# Altium PCB DoorCardController.PcbDoc (part 2 of 2)
Units mm, origin at the board's own origin, x right, y up, seen from the top; angles counter-clockwise.
Board outline 87 x 117.3 mm, 2 copper layers (Top Layer, Bottom Layer); 141 components, 112 nets, 420 pads, 246 vias.
Unrouted connection lines stored in the file: 29.
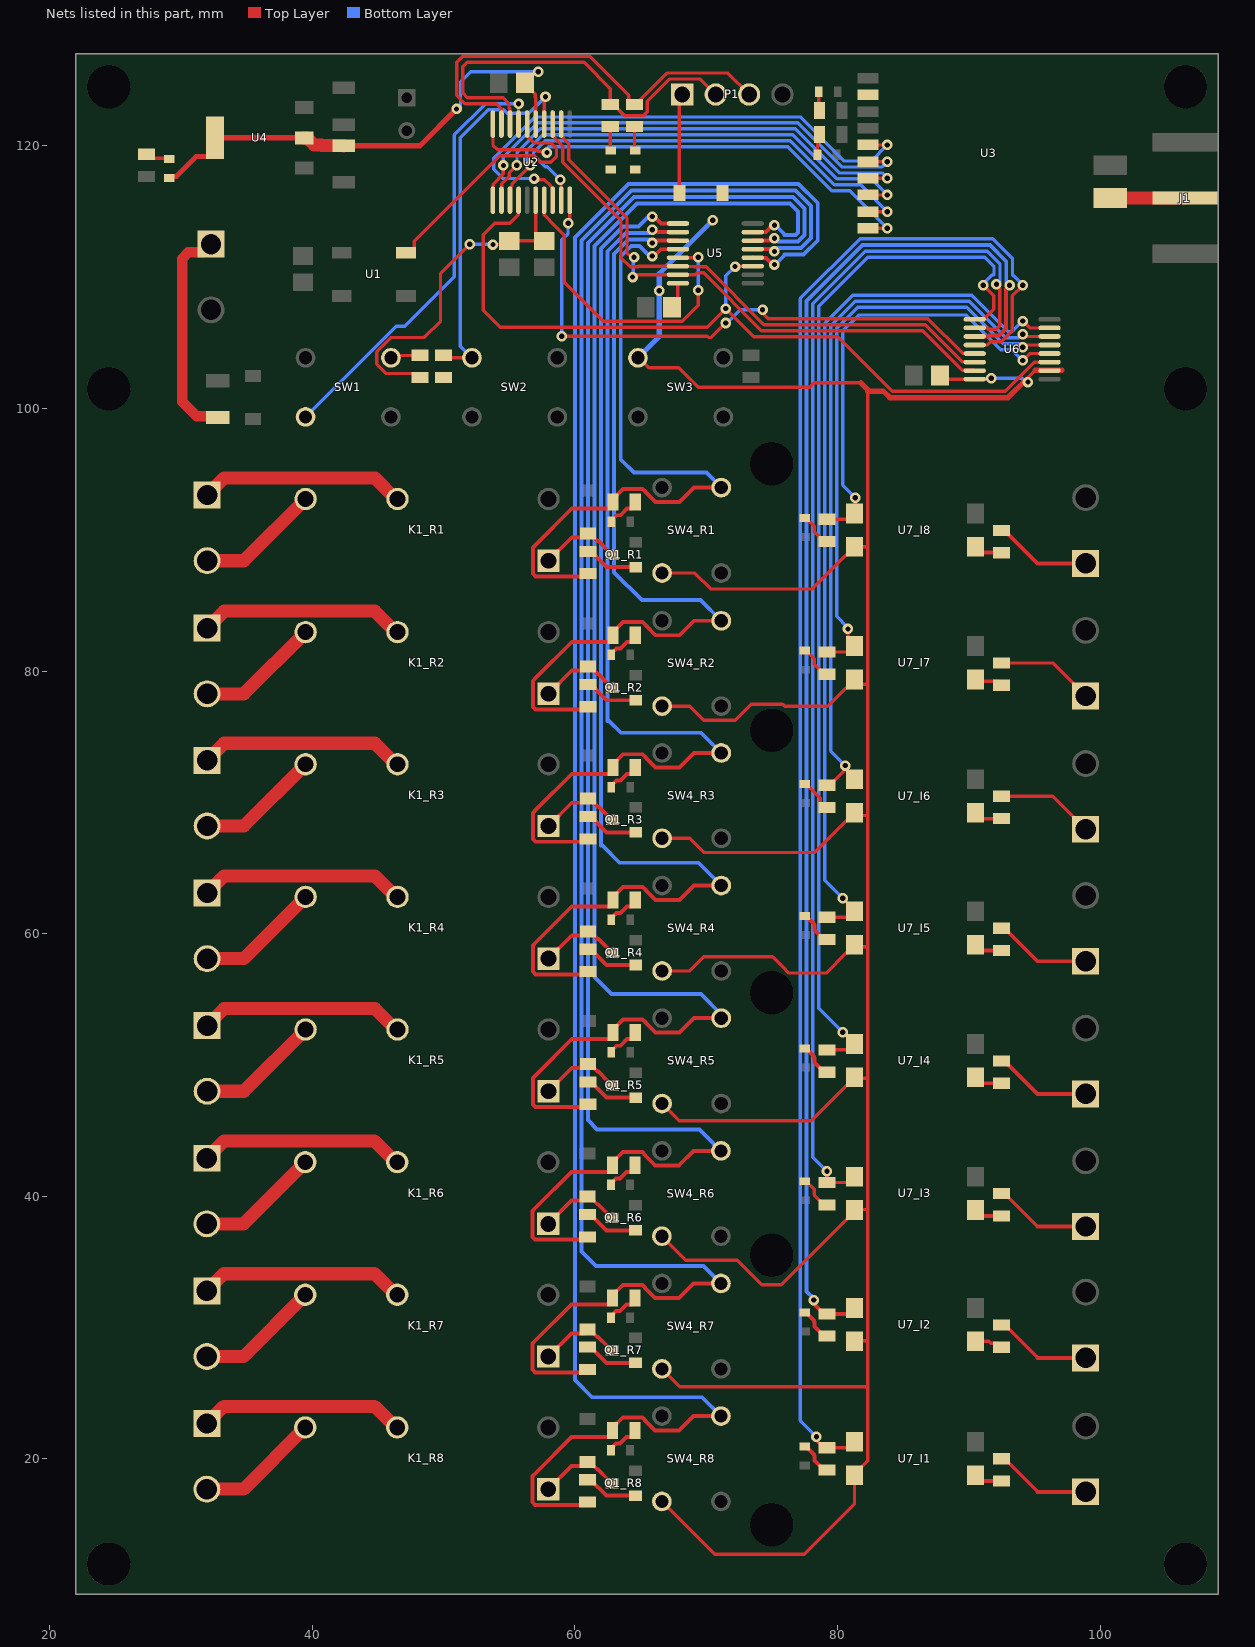
[diagram p2: the nets of this part, all layers, seen from the top]

## Via types
v1: diameter 0.8, hole 0.5, Top Layer to Bottom Layer, tented both sides, 140 vias
v2: diameter 0.8, hole 0.4, Top Layer to Bottom Layer, tented both sides, 96 vias
v3: diameter 0.8, hole 0.4, Top Layer to Bottom Layer, 10 vias

## Nets (pads, with @x,y where several pads share a name; then routed paths per layer and width w, separated by ;. In a path a pad name is that pad's centre, name@x,y a point inside that pad or via, vN(x,y) a via of type N, cw(c..) or ccw(c..) an arc to the next point about the centre after c; other vN are vias at no path point) (continued)
Input_1: R12_I8.1 U6.4 U7_I8.3 | length 34.4
  Top Layer w0.254: R12_I8.1@79.2,91.55 80.85,91.55 U7_I8.3@81.3,92 ; U7_I8.3@81.362,92.062 v2(81.362,93.2) ; v2(94.1,103.65) 94.128,103.65 94.653,104.175 U6.4@96.15,104.175
  Bottom Layer w0.254: v2(81.362,93.2) 80.4,94.162 80.4,105.9 81.605,107.105 89.8,107.105 92.436,104.469 93.281,104.469 93.373,104.377 93.373,104.349 94.072,103.65 v2(94.1,103.65)
Input_2: R12_I7.1 U6.5 U7_I7.3 | length 44.8
  Top Layer w0.254: R12_I7.1@79.2,81.45 80.85,81.45 U7_I7.3@81.3,81.9 ; v2(80.8,83.2) 80.8,82.4 U7_I7.3@80.963,82.237 ; v2(94.1,104.65) 94.275,104.825 U6.5@96.15,104.825
  Bottom Layer w0.254: v2(80.8,83.2) 80.8,83.3 79.946,84.154 79.946,106.088 81.55,107.692 89.855,107.692 92.624,104.923 93.827,104.923 v2(94.1,104.65)
Input_3: R12_I6.1 U6.6 U7_I6.3 | length 54.9
  Top Layer w0.254: R12_I6.1@79.2,71.3 79.425,71.3 80.496,72.371 80.496,72.696 v2(80.6,72.8) ; v2(94.1,105.65) 94.275,105.475 U6.6@96.15,105.475
  Bottom Layer w0.254: v2(80.6,72.8) 79.492,73.908 79.492,106.276 81.362,108.146 90.043,108.146 92.812,105.377 93.827,105.377 v2(94.1,105.65)
Input_4: R12_I5.1 U6.7 U7_I5.3 | length 67.7
  Top Layer w0.254: R12_I5.1@79.2,61.25 80.85,61.25 U7_I5.3@81.3,61.7 81.3,61.8 v2(80.4,62.7) ; v2(94.1,106.65) 94.128,106.65 94.653,106.125 U6.7@96.15,106.125
  Bottom Layer w0.254: v2(80.4,62.7) 79.038,64.062 79.038,106.464 81.174,108.6 90.231,108.6 93,105.831 93.281,105.831 93.373,105.923 93.373,105.951 94.072,106.65 v2(94.1,106.65)
Input_5: R12_I4.1 U6.9 U7_I4.3 | length 80.5
  Top Layer w0.254: R12_I4.1@79.2,51.15 80.85,51.15 U7_I4.3@81.3,51.6 v2(80.4,52.5) ; U6.9@90.45,106.775 91.125,106.775 91.9,107.55 91.9,108.586 v2(91.104,109.382)
  Bottom Layer w0.254: v2(80.4,52.5) 78.584,54.316 78.584,55.8 78.584,107.784 82.3,111.5 91.223,111.5 91.923,110.8 91.923,110.201 91.892,110.17 91.803,110.17 91.104,109.471 v2(91.104,109.382)
Input_6: R12_I3.1 U6.10 U7_I3.3 | length 92.9
  Top Layer w0.254: v3(79.2,41.9) R12_I3.1@79.2,41.05 80.85,41.05 U7_I3.3@81.3,41.5 ; U6.10@90.45,106.125 91.427,106.125 91.525,106.027 92.088,106.027 92.354,106.293 92.354,109.132 92.104,109.382 v2(92.104,109.443)
  Bottom Layer w0.254: v3(79.2,41.9) 78.13,42.97 78.13,46.1 78.13,107.972 82.112,111.954 91.411,111.954 92.377,110.988 92.377,109.716 v2(92.104,109.443)
Input_7: R12_I2.1 U6.11 U7_I2.3 | length 105.6
  Top Layer w0.3: v2(78.2,32.1) 78.296,32.004 78.296,31.729 78.975,31.05 R12_I2.1@79.2,31.05 80.85,31.05 U7_I2.3@81.3,31.5 ; U6.11@90.45,105.475 91.45,105.475 91.525,105.55 92.286,105.55 92.831,106.095 92.831,109.109 v2(93.104,109.382)
  Bottom Layer w0.3: v2(78.2,32.1) 78.2,32.208 77.653,32.755 77.653,34.1 77.653,108.17 81.914,112.431 91.609,112.431 92.854,111.186 92.854,109.632 v2(93.104,109.382)
Input_8: R12_I1.1 U6.12 U7_I1.3 | length 118.9
  Top Layer w0.254: v2(78.4,21.7) 78.504,21.595 78.504,21.321 78.975,20.85 R12_I1.1@79.2,20.85 80.85,20.85 U7_I1.3@81.3,21.3 ; U6.12@90.45,104.825 91.427,104.825 91.675,105.073 92.483,105.073 93.308,105.898 93.308,108.558 94.104,109.354 v2(94.104,109.382)
  Bottom Layer w0.254: v2(78.4,21.7) 77.176,22.924 77.176,24 77.176,108.367 81.717,112.908 91.806,112.908 93.331,111.383 93.331,110.155 93.377,110.109 93.405,110.109 94.104,109.41 v2(94.104,109.382)
INT_INP: U2.20 U6.13 | length 44.5
  Top Layer w0.254: v2(59,105.5) 70.1,105.5 70.2,105.4 70.4,105.4 v2(71.5,106.5) ; v2(59.5,114.1) 59.615,114.215 U2.20@59.615,115.85 ; v2(74.3,107.5) 74.371,107.429 74.371,107.171 74.716,106.826 86.892,106.826 89.524,104.193 90.432,104.193 U6.13@90.45,104.175
  Bottom Layer w0.254: v2(59,105.5) 59,112.827 59.486,113.314 59.486,114.086 v2(59.5,114.1) ; v2(71.5,106.5) 71.6,106.5 72.6,107.5 v2(74.3,107.5)
INT_REL: U2.17 U5.13 | length 24
  Top Layer w0.254: U2.17@57.665,115.85 57.683,115.832 57.683,114.726 58.1,114.309 58.1,114.3 59.2,113.2 59.2,109.6 62.162,106.638 68.194,106.638 69.4,107.844 v2(69.4,109) ; U5.13@67.85,111.475 69.275,111.475 69.3,111.5 v2(69.4,111.5)
  Bottom Layer w0.254: v2(69.4,109) v2(69.4,111.5)
IO_RESET: U2.14 U5.3 U6.3 | length 62.8
  Top Layer w0.254: U2.14@55.715,115.85 55.696,115.832 55.696,114.724 55.056,114.085 53.885,114.085 53.038,113.238 53.038,107.462 54.313,106.187 70.087,106.187 v2(71.5,107.6) 73.636,105.464 80.025,105.464 84.189,101.3 92.778,101.3 93.881,102.403 94.985,103.507 96.132,103.507 U6.3@96.15,103.525 ; v2(72.2,110.8) 72.225,110.825 U5.3@73.55,110.825
  Bottom Layer w0.254: v2(71.5,107.6) 71.5,110.1 v2(72.2,110.8)
IRQ: U2.18 U3.5 | length 41.5
  Top Layer w0.254: v2(56.9,117.5) 56.981,117.419 57.681,117.419 58.167,116.933 58.167,116.899 58.315,116.751 U2.18@58.315,115.85 ; U3.5@82.312,120.057 v2(83.8,120.057)
  Bottom Layer w0.254: v2(56.9,117.5) 54.535,117.5 53.836,118.199 53.836,119.032 56.996,122.192 77.165,122.192 80.524,118.833 82.576,118.833 v2(83.8,120.057)
LED: U1.4 U2.6 | length 19.4
  Top Layer w0.254: U1.4@47.15,111.85 47.45,111.85 47.773,112.173 47.773,112.738 54.275,119.241 56.887,119.241 57.375,118.753 58.181,118.753 58.607,119.179 58.607,119.781 58.181,120.207 56.873,120.207 56.513,120.567 56.513,120.601 56.365,120.749 U2.6@56.365,121.65
MISO: U2.12 U3.7 | length 36.1
  Top Layer w0.254: U2.12@54.415,115.85 54.433,115.868 54.433,117.091 55.017,117.674 55.017,117.926 55.586,118.495 v2(55.586,118.514) ; U3.7@82.312,117.517 v2(83.8,117.517)
  Bottom Layer w0.254: v2(55.586,118.514) 55.6,118.528 55.6,119.512 57.372,121.284 76.789,121.284 80.148,117.925 83.392,117.925 v2(83.8,117.517)
MOSI: U2.13 U3.8 | length 35.8
  Top Layer w0.254: U2.13@55.065,115.85 55.065,116.751 55.213,116.899 55.213,117.071 56.6,118.458 v2(56.6,118.5) ; U3.8@82.312,116.247 v2(83.8,116.247)
  Bottom Layer w0.254: v2(56.6,118.5) 56.6,118.648 56.35,118.898 56.35,119.62 57.56,120.83 76.601,120.83 79.96,117.471 82.576,117.471 v2(83.8,116.247)
NetD1_2: D1.2 P1.1 | length 7.6
  Top Layer w0.254: D1.2@67.963,116.4 67.963,123.673 P1.1@68.19,123.9
NetD3_R1_2: D3_R1.2 K1_R1.1 Q1_R1.3 | length 6.4
  Top Layer w0.3: K1_R1.1@58.062,88.338 K1_R1.1@58,88.4 59.768,90.168 60.693,90.168 D3_R1.2@61,90.475 61.153,90.475 61.733,89.895 61.788,89.895 62.529,89.153 62.529,89.113 Q1_R1.3@62.78,88.862
NetD3_R2_2: D3_R2.2 K1_R2.1 Q1_R2.3 | length 6.4
  Top Layer w0.3: K1_R2.1@58.062,78.2 K1_R2.1@58,78.263 59.768,80.03 60.692,80.03 D3_R2.2@61,80.338 61.153,80.338 61.733,79.757 61.788,79.757 62.529,79.016 62.529,78.976 Q1_R2.3@62.78,78.725
NetD3_R3_2: D3_R3.2 K1_R3.1 Q1_R3.3 | length 6.4
  Top Layer w0.3: K1_R3.1@58.062,68.138 K1_R3.1@58,68.2 59.768,69.968 60.692,69.968 D3_R3.2@61,70.275 61.153,70.275 61.733,69.695 61.788,69.695 62.529,68.953 62.529,68.913 Q1_R3.3@62.78,68.662
NetD3_R4_2: D3_R4.2 K1_R4.1 Q1_R4.3 | length 6.4
  Top Layer w0.3: K1_R4.1@58.062,58.038 K1_R4.1@58,58.1 59.768,59.868 60.692,59.868 D3_R4.2@61,60.175 61.153,60.175 61.733,59.595 61.788,59.595 62.529,58.853 62.529,58.813 Q1_R4.3@62.78,58.562
NetD3_R5_2: D3_R5.2 K1_R5.1 Q1_R5.3 | length 6.4
  Top Layer w0.3: K1_R5.1@58.062,47.938 K1_R5.1@58,48 59.768,49.768 60.692,49.768 D3_R5.2@61,50.075 61.153,50.075 61.733,49.495 61.788,49.495 62.529,48.753 62.529,48.713 Q1_R5.3@62.78,48.462
NetD3_R6_2: D3_R6.2 K1_R6.1 Q1_R6.3 | length 6.4
  Top Layer w0.3: K1_R6.1@58.039,37.838 K1_R6.1@57.977,37.9 59.744,39.668 60.669,39.668 D3_R6.2@60.977,39.975 61.129,39.975 61.709,39.395 61.764,39.395 62.506,38.653 62.506,38.613 Q1_R6.3@62.757,38.362
NetD3_R7_2: D3_R7.2 K1_R7.1 Q1_R7.3 | length 6.4
  Top Layer w0.3: K1_R7.1@58.039,27.738 K1_R7.1@57.977,27.8 59.744,29.567 60.669,29.567 D3_R7.2@60.977,29.875 61.129,29.875 61.709,29.295 61.764,29.295 62.506,28.553 62.506,28.513 Q1_R7.3@62.757,28.262
NetD3_R8_2: D3_R8.2 K1_R8.1 Q1_R8.3 | length 6.4
  Top Layer w0.3: K1_R8.1@58.039,17.638 K1_R8.1@57.977,17.7 59.744,19.467 60.669,19.467 D3_R8.2@60.977,19.775 61.129,19.775 61.709,19.195 61.764,19.195 62.506,18.453 62.506,18.413 Q1_R8.3@62.757,18.162
NetDS1_1: DS1.1 R1.2 | length 1.6
  Top Layer w0.254: DS1.1@78.475,119.3 78.475,120.687 R1.2@78.638,120.85
NetDS2_1: DS2.1 R2.2 | length 1.5
  Top Layer w0.254: DS2.1@78.575,124.1 78.575,122.738 R2.2@78.638,122.675
NetDS3_2: DS3.2 R7.2 | length 1.8
  Top Layer w0.254: R7.2@27.4,119.35 27.698,119.052 29.048,119.052 DS3.2@29.1,119
NetDS4_R1_1: DS4_R1.1 R9_R1.2 | length 2.6
  Top Layer w0.3: DS4_R1.1@62.775,91.362 62.775,91.463 63.175,91.863 63.47,91.863 63.97,92.363 64.325,92.363 64.6,92.638 R9_R1.2@64.6,92.863
NetDS4_R2_1: DS4_R2.1 R9_R2.2 | length 2.6
  Top Layer w0.3: DS4_R2.1@62.775,81.225 62.775,81.325 63.175,81.725 63.47,81.725 63.97,82.225 64.325,82.225 64.6,82.5 R9_R2.2@64.6,82.725
NetDS4_R3_1: DS4_R3.1 R9_R3.2 | length 2.6
  Top Layer w0.3: DS4_R3.1@62.775,71.162 62.775,71.263 63.175,71.663 63.47,71.663 63.97,72.162 64.325,72.162 64.6,72.438 R9_R3.2@64.6,72.663
NetDS4_R4_1: DS4_R4.1 R9_R4.2 | length 2.6
  Top Layer w0.3: DS4_R4.1@62.775,61.062 62.775,61.163 63.175,61.563 63.47,61.563 63.97,62.062 64.325,62.062 64.6,62.338 R9_R4.2@64.6,62.563
NetDS4_R5_1: DS4_R5.1 R9_R5.2 | length 2.6
  Top Layer w0.3: DS4_R5.1@62.775,50.962 62.775,51.063 63.175,51.463 63.47,51.463 63.97,51.962 64.325,51.962 64.6,52.238 R9_R5.2@64.6,52.463
NetDS4_R6_1: DS4_R6.1 R9_R6.2 | length 2.6
  Top Layer w0.3: DS4_R6.1@62.752,40.862 62.752,40.963 63.152,41.363 63.447,41.363 63.947,41.862 64.302,41.862 64.577,42.138 R9_R6.2@64.577,42.363
NetDS4_R7_1: DS4_R7.1 R9_R7.2 | length 2.6
  Top Layer w0.3: DS4_R7.1@62.752,30.762 62.752,30.863 63.152,31.263 63.447,31.263 63.947,31.762 64.302,31.762 64.577,32.038 R9_R7.2@64.577,32.263
NetDS4_R8_1: DS4_R8.1 R9_R8.2 | length 2.6
  Top Layer w0.3: DS4_R8.1@62.752,20.662 62.752,20.763 63.152,21.163 63.447,21.163 63.947,21.662 64.302,21.662 64.577,21.937 R9_R8.2@64.577,22.163
NetDS5_2: DS5.2 R5.2 | length 1.7
  Top Layer w0.254: DS5.2@64.55,119.725 R5.2@64.55,121.45
NetDS6_2: DS6.2 R10.2 | length 1.8
  Top Layer w0.254: R10.2@62.7,121.45 62.7,119.675 DS6.2@62.75,119.625
NetDS7_I1_1: DS7_I1.1 R12_I1.2 | length 2.7
  Top Layer w0.3: DS7_I1.1@77.5,20.95 77.6,20.95 78.2,20.35 78.2,20.28 78.25,20.23 78.25,19.875 78.975,19.15 R12_I1.2@79.2,19.15
NetDS7_I2_1: DS7_I2.1 R12_I2.2 | length 2.7
  Top Layer w0.3: DS7_I2.1@77.5,31.15 77.6,31.15 78.2,30.55 78.2,30.48 78.25,30.43 78.25,30.075 78.975,29.35 R12_I2.2@79.2,29.35
NetDS7_I3_1: DS7_I3.1 R12_I3.2 | length 2.7
  Top Layer w0.254: DS7_I3.1@77.5,41.15 77.6,41.15 78.223,40.527 78.223,40.139 78.227,40.135 78.227,40.098 78.975,39.35 R12_I3.2@79.2,39.35
NetDS7_I4_1: DS7_I4.1 R12_I4.2 | length 2.7
  Top Layer w0.3: DS7_I4.1@77.5,51.25 77.6,51.25 78.2,50.65 78.2,50.58 78.25,50.53 78.25,50.175 78.975,49.45 R12_I4.2@79.2,49.45
NetDS7_I5_1: DS7_I5.1 R12_I5.2 | length 2.7
  Top Layer w0.3: DS7_I5.1@77.5,61.35 77.6,61.35 78.2,60.75 78.2,60.68 78.25,60.63 78.25,60.275 78.975,59.55 R12_I5.2@79.2,59.55
NetDS7_I6_1: DS7_I6.1 R12_I6.2 | length 2.7
  Top Layer w0.254: DS7_I6.1@77.5,71.4 77.6,71.4 78.677,70.323 78.677,69.898 78.975,69.6 R12_I6.2@79.2,69.6
NetDS7_I7_1: DS7_I7.1 R12_I7.2 | length 2.7
  Top Layer w0.254: DS7_I7.1@77.5,81.55 77.6,81.55 78.223,80.927 78.223,80.539 78.227,80.535 78.227,80.498 78.975,79.75 R12_I7.2@79.2,79.75
NetDS7_I8_1: DS7_I8.1 R12_I8.2 | length 2.7
  Top Layer w0.254: DS7_I8.1@77.5,91.65 77.6,91.65 78.223,91.027 78.223,90.639 78.227,90.635 78.227,90.598 78.975,89.85 R12_I8.2@79.2,89.85
NetF1_2: F1.2 P3.1 | length 16.8
  Top Layer w0.8: P3.1@32.3,112.5 31.675,111.875 30.569,111.875 30.1,111.406 30.1,100.5 31.2,99.4 32.7,99.4 F1.2@32.8,99.3
NetJ1_1: J1.1 U3.11 | length 5.7
  Top Layer w1: U3.11@100.762,116.017 J1.1@106.5,116.017
NetK1_R1_2: K1_R1.2 P4_R1.2 | length 9.4
  Top Layer w1: P4_R1.2@32,88.4 34.8,88.4 K1_R1.2@39.5,93.1
NetK1_R1_3: K1_R1.3 P4_R1.1 | length 15.7
  Top Layer w1: P4_R1.1@32,93.4 33.3,94.7 44.777,94.7 46.377,93.1 K1_R1.3@46.5,93.1
NetK1_R2_2: K1_R2.2 P4_R2.2 | length 9.4
  Top Layer w1: P4_R2.2@32,78.263 34.8,78.263 K1_R2.2@39.5,82.963
NetK1_R2_3: K1_R2.3 P4_R2.1 | length 15.7
  Top Layer w1: P4_R2.1@32,83.263 33.3,84.563 44.777,84.563 46.377,82.963 K1_R2.3@46.5,82.963
NetK1_R3_2: K1_R3.2 P4_R3.2 | length 9.4
  Top Layer w1: P4_R3.2@32,68.2 34.8,68.2 K1_R3.2@39.5,72.9
NetK1_R3_3: K1_R3.3 P4_R3.1 | length 15.7
  Top Layer w1: P4_R3.1@32,73.2 33.3,74.5 44.777,74.5 46.377,72.9 K1_R3.3@46.5,72.9
NetK1_R4_2: K1_R4.2 P4_R4.2 | length 9.4
  Top Layer w1: P4_R4.2@32,58.1 34.8,58.1 K1_R4.2@39.5,62.8
NetK1_R4_3: K1_R4.3 P4_R4.1 | length 15.7
  Top Layer w1: P4_R4.1@32,63.1 33.3,64.4 44.777,64.4 46.377,62.8 K1_R4.3@46.5,62.8
NetK1_R5_2: K1_R5.2 P4_R5.2 | length 9.4
  Top Layer w1: P4_R5.2@32,48 34.8,48 K1_R5.2@39.5,52.7
NetK1_R5_3: K1_R5.3 P4_R5.1 | length 15.7
  Top Layer w1: P4_R5.1@32,53 33.3,54.3 44.777,54.3 46.377,52.7 K1_R5.3@46.5,52.7
NetK1_R6_2: K1_R6.2 P4_R6.2 | length 9.4
  Top Layer w1: P4_R6.2@31.977,37.9 34.777,37.9 K1_R6.2@39.477,42.6
NetK1_R6_3: K1_R6.3 P4_R6.1 | length 15.7
  Top Layer w1: P4_R6.1@31.977,42.9 33.277,44.2 44.753,44.2 46.353,42.6 K1_R6.3@46.477,42.6
NetK1_R7_2: K1_R7.2 P4_R7.2 | length 9.4
  Top Layer w1: P4_R7.2@31.977,27.8 34.777,27.8 K1_R7.2@39.477,32.5
NetK1_R7_3: K1_R7.3 P4_R7.1 | length 15.7
  Top Layer w1: P4_R7.1@31.977,32.8 33.277,34.1 44.753,34.1 46.353,32.5 K1_R7.3@46.477,32.5
NetK1_R8_2: K1_R8.2 P4_R8.2 | length 9.4
  Top Layer w1: P4_R8.2@31.977,17.7 34.777,17.7 K1_R8.2@39.477,22.4
NetK1_R8_3: K1_R8.3 P4_R8.1 | length 15.7
  Top Layer w1: P4_R8.1@31.977,22.7 33.277,24 44.753,24 46.353,22.4 K1_R8.3@46.477,22.4
NetP5_I1_1: P5_I1.1 R11_I1.1 | length 7.4
  Top Layer w0.254: R11_I1.1@92.5,20.01 92.725,20.01 95.235,17.5
  Top Layer w0.3: 95.235,17.5 P5_I1.1@98.9,17.5
NetP5_I2_1: P5_I2.1 R11_I2.1 | length 7.4
  Top Layer w0.254: R11_I2.1@92.5,30.21 92.725,30.21 95.235,27.7
  Top Layer w0.3: 95.235,27.7 P5_I2.1@98.9,27.7
NetP5_I3_1: P5_I3.1 R11_I3.1 | length 7.4
  Top Layer w0.254: R11_I3.1@92.5,40.21 92.725,40.21 95.235,37.7
  Top Layer w0.3: 95.235,37.7 P5_I3.1@98.9,37.7
NetP5_I4_1: P5_I4.1 R11_I4.1 | length 7.4
  Top Layer w0.3: R11_I4.1@92.5,50.31 92.725,50.31 95.235,47.8 P5_I4.1@98.9,47.8
NetP5_I5_1: P5_I5.1 R11_I5.1 | length 7.4
  Top Layer w0.3: R11_I5.1@92.5,60.41 92.725,60.41 95.235,57.9 P5_I5.1@98.9,57.9
NetP5_I6_1: P5_I6.1 R11_I6.1 | length 7.4
  Top Layer w0.254: R11_I6.1@92.5,70.46 96.39,70.46 P5_I6.1@98.9,67.95
NetP5_I7_1: P5_I7.1 R11_I7.1 | length 7.4
  Top Layer w0.254: R11_I7.1@92.5,80.61 96.39,80.61 P5_I7.1@98.9,78.1
NetP5_I8_1: P5_I8.1 R11_I8.1 | length 7.4
  Top Layer w0.3: R11_I8.1@92.5,90.71 92.725,90.71 95.235,88.2 P5_I8.1@98.9,88.2
NetQ1_R1_1: Q1_R1.1 R8_R1.1 | length 4.1
  Top Layer w0.3: R8_R1.1@61,89.113 61.225,89.113 62.425,87.912 Q1_R1.1@64.635,87.912
NetQ1_R2_1: Q1_R2.1 R8_R2.1 | length 4.1
  Top Layer w0.3: R8_R2.1@61,78.975 61.225,78.975 62.425,77.775 Q1_R2.1@64.635,77.775
NetQ1_R3_1: Q1_R3.1 R8_R3.1 | length 4.1
  Top Layer w0.3: R8_R3.1@61,68.913 61.225,68.913 62.425,67.712 Q1_R3.1@64.635,67.713
NetQ1_R4_1: Q1_R4.1 R8_R4.1 | length 4.1
  Top Layer w0.3: R8_R4.1@61,58.813 61.225,58.813 62.425,57.612 Q1_R4.1@64.635,57.612
NetQ1_R5_1: Q1_R5.1 R8_R5.1 | length 4.1
  Top Layer w0.3: R8_R5.1@61,48.713 61.225,48.713 62.425,47.512 Q1_R5.1@64.635,47.512
NetQ1_R6_1: Q1_R6.1 R8_R6.1 | length 4.1
  Top Layer w0.3: R8_R6.1@60.977,38.613 61.202,38.613 62.402,37.412 Q1_R6.1@64.612,37.413
NetQ1_R7_1: Q1_R7.1 R8_R7.1 | length 4.1
  Top Layer w0.3: R8_R7.1@60.977,28.513 61.202,28.513 62.402,27.312 Q1_R7.1@64.612,27.313
NetQ1_R8_1: Q1_R8.1 R8_R8.1 | length 4.1
  Top Layer w0.3: R8_R8.1@60.977,18.413 61.202,18.413 62.402,17.212 Q1_R8.1@64.612,17.212
NetR3_1: R3.1 SW1.3 | length 2.2
  Top Layer w0.254: SW1.3@46.5,104.022 R3.1@48.572,104.022 ; SW1.3@46.525,103.5 SW1.3@46.525,103.622
NetR11_I1_2: R11_I1.2 U7_I1.1 | length 2.2
  Top Layer w0.3: U7_I1.1@90.5,18.76 90.95,18.31 R11_I1.2@92.5,18.31
NetR11_I2_2: R11_I2.2 U7_I2.1 | length 2.2
  Top Layer w0.254: U7_I2.1@90.5,28.96 91.531,28.96 91.683,28.808 92.202,28.808 R11_I2.2@92.5,28.51
NetR11_I3_2: R11_I3.2 U7_I3.1 | length 2.2
  Top Layer w0.3: U7_I3.1@90.5,38.96 90.95,38.51 R11_I3.2@92.5,38.51
NetR11_I4_2: R11_I4.2 U7_I4.1 | length 2.2
  Top Layer w0.3: U7_I4.1@90.5,49.06 90.95,48.61 R11_I4.2@92.5,48.61
NetR11_I5_2: R11_I5.2 U7_I5.1 | length 2.2
  Top Layer w0.3: U7_I5.1@90.5,59.16 90.95,58.71 R11_I5.2@92.5,58.71
NetR11_I6_2: R11_I6.2 U7_I6.1 | length 2.2
  Top Layer w0.254: U7_I6.1@90.5,69.21 90.95,68.76 R11_I6.2@92.5,68.76
NetR11_I7_2: R11_I7.2 U7_I7.1 | length 2.2
  Top Layer w0.254: U7_I7.1@90.5,79.36 90.652,79.208 92.202,79.208 R11_I7.2@92.5,78.91
NetR11_I8_2: R11_I8.2 U7_I8.1 | length 2.2
  Top Layer w0.3: U7_I8.1@90.5,89.46 90.95,89.01 R11_I8.2@92.5,89.01
NRST: R4.1 SW2.1 U2.4 | length 29.5
  Top Layer w0.254: R4.1@50,104.05 50.2,103.85 SW2.1@52.165,103.85 ; U2.4@57.665,121.65 v3@57.665,123.732
  Bottom Layer w0.254: SW2.1@52.165,103.85 51.273,104.742 51.273,120.619 53.4,122.746 54.571,122.746 54.844,122.473 56.509,122.473 v3(57.768,123.732)
nSEL: U2.19 U3.9 | length 35.6
  Top Layer w0.254: v2(58.9,117.4) 58.946,117.354 58.946,115.868 U2.19@58.965,115.85 ; U3.9@82.312,114.977 v2(83.8,114.977)
  Bottom Layer w0.254: v2(58.9,117.4) 57.911,118.389 57.739,118.389 56.855,119.273 56.855,119.483 57.748,120.376 76.413,120.376 79.772,117.017 81.76,117.017 v2(83.8,114.977)
Relay_1: R8_R8.2 R9_R8.1 SW4_R8.4 U5.4 | length 152.6
  Top Layer w0.3: R8_R8.2@60.977,16.713 60.764,16.5 56.982,16.5 56.777,16.705 56.777,18.695 57.026,18.945 59.744,21.662 62.602,21.662 62.877,21.937 R9_R8.1@62.877,22.163 62.877,22.388 63.652,23.163 65.147,23.163 65.352,22.957 65.352,22.925 66.114,22.163 67.936,22.163 69.036,23.263 SW4_R8.4@71.127,23.263 ; U5.4@73.55,111.475 73.56,111.465 74.549,111.465 75.065,110.95 v2(75.2,110.95)
  Bottom Layer w0.3: SW4_R8.4@71.127,23.263 69.689,24.7 61.3,24.7 60,26 60,113 64.1,117.1 77.021,117.1 78.5,115.621 78.5,112.779 77.421,111.7 75.95,111.7 75.95,111.639 75.261,110.95 v2(75.2,110.95)
Relay_2: R8_R7.2 R9_R7.1 SW4_R7.4 U5.5 | length 139.3
  Top Layer w0.3: R8_R7.2@60.977,26.813 60.764,26.6 56.982,26.6 56.777,26.805 56.777,28.795 57.026,29.045 59.744,31.762 62.602,31.762 62.877,32.038 R9_R7.1@62.877,32.263 62.877,32.488 63.652,33.263 65.147,33.263 65.352,33.057 65.352,33.025 66.114,32.263 67.936,32.263 69.036,33.363 SW4_R7.4@71.127,33.363 ; U5.5@73.55,112.125 75.025,112.125 v2(75.2,111.95)
  Bottom Layer w0.3: SW4_R7.4@71.127,33.363 69.789,34.7 61.6,34.7 60.5,35.8 60.5,112.793 64.307,116.6 76.814,116.6 78,115.414 78,112.986 77.214,112.2 75.45,112.2 v2(75.2,111.95)
Relay_3: R8_R6.2 R9_R6.1 SW4_R6.4 U5.6 | length 126.3
  Top Layer w0.3: R8_R6.2@60.977,36.913 60.764,36.7 56.982,36.7 56.777,36.905 56.777,38.895 57.026,39.145 59.744,41.862 62.602,41.862 62.877,42.138 R9_R6.1@62.877,42.363 62.877,42.588 63.652,43.363 65.147,43.363 65.352,43.157 65.352,43.125 66.114,42.363 67.936,42.363 69.036,43.463 SW4_R6.4@71.127,43.463 ; U5.6@73.55,112.775 75.025,112.775 v2(75.2,112.95)
  Bottom Layer w0.3: SW4_R6.4@71.127,43.463 69.489,45.1 61.7,45.1 61,45.8 61,112.586 64.514,116.1 76.607,116.1 77.5,115.207 77.5,113.193 77.007,112.7 75.45,112.7 v2(75.2,112.95)
Relay_4: R8_R5.2 R9_R5.1 SW4_R5.4 U5.7 | length 113.3
  Top Layer w0.3: R8_R5.2@61,47.013 60.787,46.8 57.005,46.8 56.8,47.005 56.8,48.995 57.05,49.245 59.768,51.962 62.625,51.962 62.9,52.238 R9_R5.1@62.9,52.463 62.9,52.688 63.675,53.463 65.17,53.463 65.375,53.257 65.375,53.225 66.137,52.463 67.96,52.463 69.06,53.563 SW4_R5.4@71.15,53.563 ; U5.7@73.55,113.425 73.56,113.435 74.549,113.435 75.065,113.95 v2(75.2,113.95)
  Bottom Layer w0.3: SW4_R5.4@71.15,53.563 71.15,53.85 69.6,55.4 62.8,55.4 61.5,56.7 61.5,112.378 64.722,115.6 76.4,115.6 77,115 77,113.4 76.8,113.2 75.95,113.2 75.95,113.261 75.261,113.95 v2(75.2,113.95)
Relay_5: R8_R4.2 R9_R4.1 SW4_R4.4 U5.9 | length 86.6
  Top Layer w0.3: R8_R4.2@61,57.113 60.787,56.9 57.005,56.9 56.8,57.105 56.8,59.095 57.05,59.345 59.768,62.062 62.625,62.062 62.9,62.338 R9_R4.1@62.9,62.563 62.9,62.788 63.675,63.563 65.17,63.563 65.375,63.357 65.375,63.325 66.137,62.563 67.96,62.563 69.06,63.663 SW4_R4.4@71.15,63.663 ; v2(65.9,114.6) 66.035,114.6 66.551,114.085 U5.9@67.84,114.085
  Bottom Layer w0.3: 62,66.7 62,112.171 63.679,113.85 64.865,113.85 65.615,114.6 v2(65.9,114.6) ; 62.101,66.7 63.401,65.4 69.413,65.4 SW4_R4.4@71.15,63.663
Relay_6: R8_R3.2 R9_R3.1 SW4_R3.4 U5.10 | length 75.1
  Top Layer w0.3: R8_R3.2@61,67.213 60.787,67 57.005,67 56.8,67.205 56.8,69.195 57.05,69.445 59.768,72.162 62.625,72.162 62.9,72.438 R9_R3.1@62.9,72.663 62.9,72.888 63.675,73.663 65.17,73.663 65.375,73.457 65.375,73.425 66.137,72.663 67.96,72.663 69.06,73.763 SW4_R3.4@71.15,73.763 ; v2(65.9,113.6) 66.075,113.425 U5.10@67.85,113.425
  Bottom Layer w0.3: 62.5,76.2 62.5,111.964 63.886,113.35 65.65,113.35 v2(65.9,113.6) ; 62.601,76.2 63.501,75.3 69.613,75.3 SW4_R3.4@71.15,73.763
Relay_7: R8_R2.2 R9_R2.1 SW4_R2.4 U5.11 | length 63.1
  Top Layer w0.3: R8_R2.2@61,77.275 60.787,77.063 57.005,77.063 56.8,77.268 56.8,79.257 57.05,79.507 59.768,82.225 62.625,82.225 62.9,82.5 R9_R2.1@62.9,82.725 62.9,82.95 63.675,83.725 65.17,83.725 65.375,83.52 65.375,83.487 66.137,82.725 67.96,82.725 69.06,83.825 SW4_R2.4@71.15,83.825 ; v2(65.9,112.6) 66.075,112.775 U5.11@67.85,112.775
  Bottom Layer w0.3: v2(65.9,112.6) 65.65,112.85 64.093,112.85 63,111.757 63,87.5 65.1,85.4 69.575,85.4 SW4_R2.4@71.15,83.825
Relay_8: R8_R1.2 R9_R1.1 SW4_R1.4 U5.12 | length 52.9
  Top Layer w0.3: R8_R1.2@61,87.413 60.787,87.2 57.005,87.2 56.8,87.405 56.8,89.395 57.05,89.645 59.768,92.363 62.625,92.363 62.9,92.638 R9_R1.1@62.9,92.863 62.9,93.088 63.675,93.863 65.17,93.863 65.375,93.657 65.375,93.625 66.137,92.863 67.96,92.863 69.06,93.963 SW4_R1.4@71.15,93.963 ; v2(65.9,111.6) 66.035,111.6 66.551,112.115 U5.12@67.84,112.115
  Bottom Layer w0.3: v2(65.9,111.6) 65.687,111.6 64.936,112.35 64.3,112.35 63.5,111.55 63.5,96.1 64.5,95.1 70.013,95.1 SW4_R1.4@71.15,93.963
RX: P1.3 R5.1 U2.9 | length 33.4
  Top Layer w0.254: U2.9@54.415,121.65 54.396,121.668 54.396,122.804 54.004,123.196 51.632,123.196 51,123.828 51,126.342 51.466,126.809 61.12,126.809 64.1,123.828 64.1,123.448 64.398,123.15 R5.1@64.55,123.15 64.635,123.15 67.017,125.531 71.639,125.531 P1.3@73.27,123.9
SCK: U2.11 U3.6 | length 37
  Top Layer w0.254: U2.11@53.765,115.85 53.783,115.868 53.783,117.083 54.563,117.863 v2(54.563,118.5) ; U3.6@82.312,118.787 v2(83.8,118.787)
  Bottom Layer w0.254: v2(54.563,118.5) 54.563,119.117 57.184,121.738 76.977,121.738 80.336,118.379 83.392,118.379 v2(83.8,118.787)
SCL: U2.3 U5.14 U6.14 | length 42.6
  Top Layer w0.254: U2.3@58.315,121.65 58.315,120.749 58.463,120.601 58.463,120.567 59.081,119.949 59.081,118.744 63.516,114.309 63.516,111.47 64.213,110.773 64.816,110.773 64.868,110.825 U5.14@67.85,110.825 67.868,110.807 69.065,110.807 69.099,110.773 69.999,110.773 74.4,106.372 86.683,106.372 89.511,103.543 90.432,103.543 U6.14@90.45,103.525
SDA: U2.2 U5.15 U6.15 | length 43.4
  Top Layer w0.254: U2.2@58.965,121.65 58.965,120.749 59.113,120.601 59.113,120.559 59.535,120.137 59.535,118.932 63.97,114.497 63.97,111.85 64.32,111.5 v2(64.514,111.5) ; v2(64.4,110) 64.548,110 64.723,110.175 U5.15@67.85,110.175 69.173,110.175 69.317,110.319 69.811,110.319 74.212,105.918 86.495,105.918 89.519,102.893 90.432,102.893 U6.15@90.45,102.875
  Bottom Layer w0.254: v2(64.4,110) 64.457,110.057 64.457,111.443 v2(64.514,111.5)
SDN: U2.10 U3.10 | length 36.3
  Top Layer w0.254: U2.10@53.765,121.65 53.765,120.052 54.122,119.695 57.075,119.695 57.186,119.584 57.775,119.584 v2(57.88,119.48) ; U3.10@82.312,113.707 v2(83.8,113.707)
  Bottom Layer w0.254: v2(57.88,119.48) 57.855,119.504 57.855,119.755 58.022,119.922 76.225,119.922 79.584,116.563 80.944,116.563 v2(83.8,113.707)
SW1: SW1.2 U2.7 | length 34
  Top Layer w0.254: U2.7@55.715,121.65 v2(55.715,123.2)
  Bottom Layer w0.254: SW1.2@39.5,99.35 46.4,106.25 47.066,106.25 50.819,110.003 50.819,120.819 53.2,123.2 v2(55.715,123.2)
TX: P1.2 R10.1 U2.8 | length 31.4
  Top Layer w0.254: U2.8@55.065,121.65 55.046,121.668 55.046,122.84 54.988,122.899 54.988,123.212 54.55,123.65 51.82,123.65 51.454,124.016 51.454,126 51.809,126.355 60.7,126.355 62.7,124.355 R10.1@62.7,123.15 62.925,123.15 63.775,122.3 65.237,122.3 65.527,122.59 65.527,123.399 67.205,125.077 69.553,125.077 P1.2@70.73,123.9
VCC: C1.2 C2.2 C3.2 C5.2 C8.2 C9.2 D1.1 DS3.1 DS5.1 DS6.1 R3.2 R4.2 SW3.1 SW4_R1.1 SW4_R2.1 SW4_R3.1 SW4_R4.1 SW4_R5.1 SW4_R6.1 SW4_R7.1 SW4_R8.1 U2.5 U2.16 U3.2 U4.2 U4.4 U5.16 U6.2 U6.16 U7_I1.4 U7_I2.4 U7_I3.4 U7_I4.4 U7_I5.4 U7_I6.4 U7_I7.4 U7_I8.4 | length 348.5
  Top Layer w0.254: R3.2@48.2,102.35 47.902,102.648 45.652,102.648 44.923,103.377 44.923,104.296 46.027,105.4 48.523,105.4 49.773,106.65 49.773,110.273 v2(52,112.5) ; v2(53.765,112.475) 54.736,112.475 C3.2@55.011,112.75 57.565,112.75 57.027,113.288 57.027,115.838 U2.16@57.015,115.85 ; U2.5@57.015,121.65 57.015,123.667 56.981,123.7 56.981,123.919 56.2,124.7 C1.2@56.2,124.8 56.2,124.9 56.748,125.448 57.032,125.448 v2(57.212,125.628) ; SW3.1@64.805,103.85 64.891,103.85 65.648,103.093 67.928,103.093 69.408,101.613 77.885,101.613 78.217,101.945 81.787,101.945 ; SW4_R8.1@66.627,16.762 70.639,12.75 77.463,12.75 81.3,16.587 U7_I1.4@81.3,18.76 81.3,18.86 82.312,19.872 82.312,25.5 ; SW4_R7.1@66.627,26.862 67.989,25.5 82.312,25.5 ; SW4_R6.1@66.627,36.962 68.452,35.137 72.375,35.137 74.25,33.263 75.703,33.263 U7_I3.4@81.3,38.86 ; SW4_R5.1@66.65,47.062 67.962,45.75 77.99,45.75 80.677,48.437 80.777,48.437 81.3,48.96 U7_I4.4@81.3,49.06 81.36,49 82.312,49 ; SW4_R4.1@66.65,57.162 68.753,57.162 69.83,58.239 75.056,58.239 75.819,57.477 76.296,57 79.14,57 80.677,58.537 80.777,58.537 81.3,59.06 U7_I5.4@81.3,59.16 81.46,59 82.312,59 ; SW4_R3.1@66.65,67.262 68.753,67.262 69.83,66.185 78.276,66.185 U7_I6.4@80.677,68.587 ; SW4_R2.1@66.65,77.325 68.753,77.325 69.83,76.248 72.21,76.248 73.439,77.477 75.819,77.477 75.991,77.305 79.245,77.305 80.677,78.737 80.777,78.737 81.3,79.26 U7_I7.4@81.3,79.36 81.66,79 82.312,79 ; SW4_R1.1@66.65,87.462 69.13,87.462 70.342,86.25 78.09,86.25 80.677,88.837 80.777,88.837 81.3,89.36 U7_I8.4@81.3,89.46 82.312,89.46 ; C9.2@67.4,107.7 67.85,108.15 U5.16@67.85,109.525 ; U7_I2.4@81.3,28.96 81.34,29 82.312,29 ; U7_I3.4@81.3,38.96 81.34,39 82.312,39 ; U7_I6.4@81.3,69.21 81.51,69 82.312,69 ; 82.312,101.3 82.312,89.46 ; C8.2@87.8,102.5 88.075,102.225 U6.16@90.45,102.225 90.468,102.243 91.644,102.243 v3(91.701,102.3) ; v3(94.5,102) 94.5,102.333 95.067,102.9 ; 82.312,25.5 82.312,29 ; 82.312,29 82.312,39 ; 82.312,39 82.312,49 ; 82.312,49 82.312,59 ; 82.312,59 82.312,69 ; 82.312,69 82.312,79 ; 82.312,79 82.312,89.46
  Top Layer w0.4: DS3.1@29.1,117.55 29.2,117.65 29.65,117.65 31.175,119.175 32.1,119.175 32.6,119.675 U4.4@32.6,120.6 U4.2@39.4,120.6 ; C5.2@42.4,120 48.2,120 v2(51,122.8) ; 81.787,101.945 81.787,101.933 82.312,101.408 82.312,101.3 83.5,101.3 83.987,100.813 92.98,100.813 v3@94.333,102.166 ; 95.067,102.9 97.075,102.9
  Top Layer w1: U4.2@39.4,120.6 39.6,120.6 40.148,120.052 40.7,120.052 40.727,120.025 42.375,120.025 C5.2@42.4,120
  Bottom Layer w0.254: v2(51,122.8) 51.148,122.8 51.297,122.949 51.299,122.949 51.299,124.863 52.064,125.628 v2(57.212,125.628) ; v2(52,112.5) 52.013,112.487 53.752,112.487 v2(53.765,112.475) ; v3(91.701,102.3) 94.052,102.3 94.352,102 v3(94.5,102)
  Bottom Layer w0.4: SW3.1@64.805,103.85 66.428,105.472 v3(66.428,108.955) 66.428,110.246 v3(70.5,114.319)
pads on no net: SW1.1 SW1.4 SW2.2 SW2.4 SW3.2 SW3.4 SW4_R1.2 SW4_R1.3 SW4_R2.2 SW4_R2.3 SW4_R3.2 SW4_R3.3 SW4_R4.2 SW4_R4.3 SW4_R5.2 SW4_R5.3 SW4_R6.2 SW4_R6.3 SW4_R7.2 SW4_R7.3 SW4_R8.2 SW4_R8.3 U1.2

## Polygon pours and split planes (outlines as drawn)
VCC on Top Layer "Top Layer-SDN" (solid, remove dead copper, pour order 10): 42.5,127 42.5,101.5 81.25,101.5 81.25,100.5 98.75,100.5 98.75,110.5 85.7,110.5 85.7,127
5V on Top Layer "Top Layer-5V" (solid, remove dead copper, pour order 8): 81.25,9.75 81.25,101.3 42.5,101.3 42.5,127 22,127 22,98.75 57,98.75 57,9.75
GND_24V_ISO on Top Layer "Top Layer-GND_24V_ISO" (solid, remove dead copper, pour order 16): 93.75,95.5 104.5,95.5 104.5,15.06 104.4,14.96 104.36,15 93.75,15
GND on Top Layer "Top Layer-GND 1" (solid, remove dead copper, pour order 12): 85.7,127 109,127 109,100.5 98.75,100.5 98.75,110.5 85.7,110.5
no net on Mechanical 1 (solid, remove dead copper): 81.362,67
GND on Bottom Layer "Bottom Layer-GND 1" (solid, remove dead copper, pour order 6): 22,127 109,127 109,101 81.362,101 81.3,100.938 81.3,9.75 57,9.75 57,98.75 22,98.75

## Silkscreen, mask and mechanical layers (free items; w line width, h text height)
Top Overlay:
  lines w0.254: 32.077,14.4 32.077,12 34.977,12 ; 96,12 98.9,12 98.9,14.4
  text "3.3vV TX RX GND" at 66.1,119.725 h1.5
  text "POWER IN" at 24.7,114.8 h2 r270
  text "5V GND" at 22.7,113.4 h2 r270
  text "ANT" at 103.9,108.3 h1.5
  text "FUNCTION" at 39.8,105.1 h1.5
  text "RESET" at 53.39,105 h1.5
  text "BOOT" at 68.2,105 h1.5
  text "Andreas Kellermann" at 78.8,99.4 h2
  text "DoorCard Receiver" at 78.9,98 h2
  text "2019-1" at 78.8,96.4 h2
  text "RELAY" at 24.4,93.2 h2 r270
  text "1" at 22.4,91.09 h2 r270
  text "1" at 108.5,90.5 h2 r90
  text "IN REF" at 106.6,88.11 h2 r90
  text "RELAY" at 24.4,83 h2 r270
  text "2" at 22.3,81.292 h2 r270
  text "2" at 108.6,80.702 h2 r90
  text "IN REF" at 106.7,78.275 h2 r90
  text "RELAY" at 24.4,72.8 h2 r270
  text "3" at 22.4,70.693 h2 r270
  text "3" at 108.5,70.102 h2 r90
  text "IN REF" at 106.6,67.675 h2 r90
  text "RELAY" at 24.4,62.8 h2 r270
  text "4" at 22.4,60.552 h2 r270
  text "4" at 108.5,59.962 h2 r90
  text "IN REF" at 106.6,57.5 h2 r90
  text "RELAY" at 24.4,53.2 h2 r270
  text "5" at 22.4,50.452 h2 r270
  text "5" at 108.5,49.862 h2 r90
  text "IN REF" at 106.6,47.475 h2 r90
  text "RELAY" at 24.4,42.875 h2 r270
  text "6" at 22.4,40.64 h2 r270
  text "6" at 108.5,40.05 h2 r90
  text "IN REF" at 106.6,37.5 h2 r90
  text "RELAY" at 24.4,32.7 h2 r270
  text "7" at 22.4,30.54 h2 r270
  text "7" at 108.5,29.95 h2 r90
  text "IN REF" at 106.6,27.51 h2 r90
  text "RELAY" at 24.5,23 h2 r270
  text "8" at 22.5,20.64 h2 r270
  text "8" at 108.4,20.05 h2 r90
  text "IN REF" at 106.5,17.61 h2 r90
  text "Relay - 5A 48V Max" at 35.977,11 h2
  text "Digital Input 5-24V" at 81,11 h2
Mechanical 1:
  lines w0.254: 23.75,127 107.73,127 cw(c107.73,125.73) 109,125.73 109,11.02 cw(c107.73,11.02) 107.73,9.75 23.27,9.75 cw(c23.27,11.02) 22,11.02 22,125.73 cw(c23.27,125.73) 23.27,127 24.25,127 ; 27,96 27,98 55,98 55,96 27,96 ; 85,16.265 85,23.463 85,24.16 86,24.16 86,16.265 85,16.265 ; 85,26.265 85,33.463 85,34.16 86,34.16 86,26.265 85,26.265 ; 85,36.265 85,43.463 85,44.16 86,44.16 86,36.265 85,36.265 ; 85,46.265 85,53.463 85,54.16 86,54.16 86,46.265 85,46.265 ; 85,56.765 85,63.963 85,64.66 86,64.66 86,56.765 85,56.765 ; 85,66.765 85,73.963 85,74.66 86,74.66 86,66.765 85,66.765 ; 85,76.765 85,83.963 85,84.66 86,84.66 86,76.765 85,76.765 ; 85,86.765 86,86.765 86,94.66 85,94.66 85,93.963 85,86.765 ; 89,95.787 89,97 103,97 104,97 104,92 103,92 103,95.787 89,95.787
Mechanical 3:
  lines w0.254: 21.75,123.2 cw(c21.75,122.95) 22,122.95 22,11.02 ccw(c23.27,11.02) 23.27,9.75 107.73,9.75 ccw(c107.73,11.02) 109,11.02 109,125.73 ccw(c107.73,125.73) 107.73,127 23.27,127 ccw(c23.27,125.73) 22,125.73 22,105.25 ; 27,96 27,98 55,98 55,96 27,96 ; 85,16.25 86,16.25 86,24.25 85,24.25 85,16.25 ; 85,26.25 86,26.25 86,34.25 85,34.25 85,26.25 ; 85,36.25 86,36.25 86,44.25 85,44.25 85,36.25 ; 85,46.25 86,46.25 86,54.25 85,54.25 85,46.25 ; 85,56.75 86,56.75 86,64.75 85,64.75 85,56.75 ; 85,66.75 86,66.75 86,74.75 85,74.75 85,66.75 ; 85,76.75 86,76.75 86,84.75 85,84.75 85,76.75 ; 85,86.75 85,94.75 86,94.75 86,86.75 85,86.75 ; 89,95.787 89,97 104,97 104,92.5 103,92.5 103,95.787 89,95.787

## Text inside footprints (layer, text, board x,y; h text height)
C6: Top Overlay "+" at 46.45,127.05 h1.5 r270
J1: Mechanical 3 "Board Edge" at 109,124.117 h0.2 r270